# EAGLE board Mixer v18 (EAGLE 9.7.0)
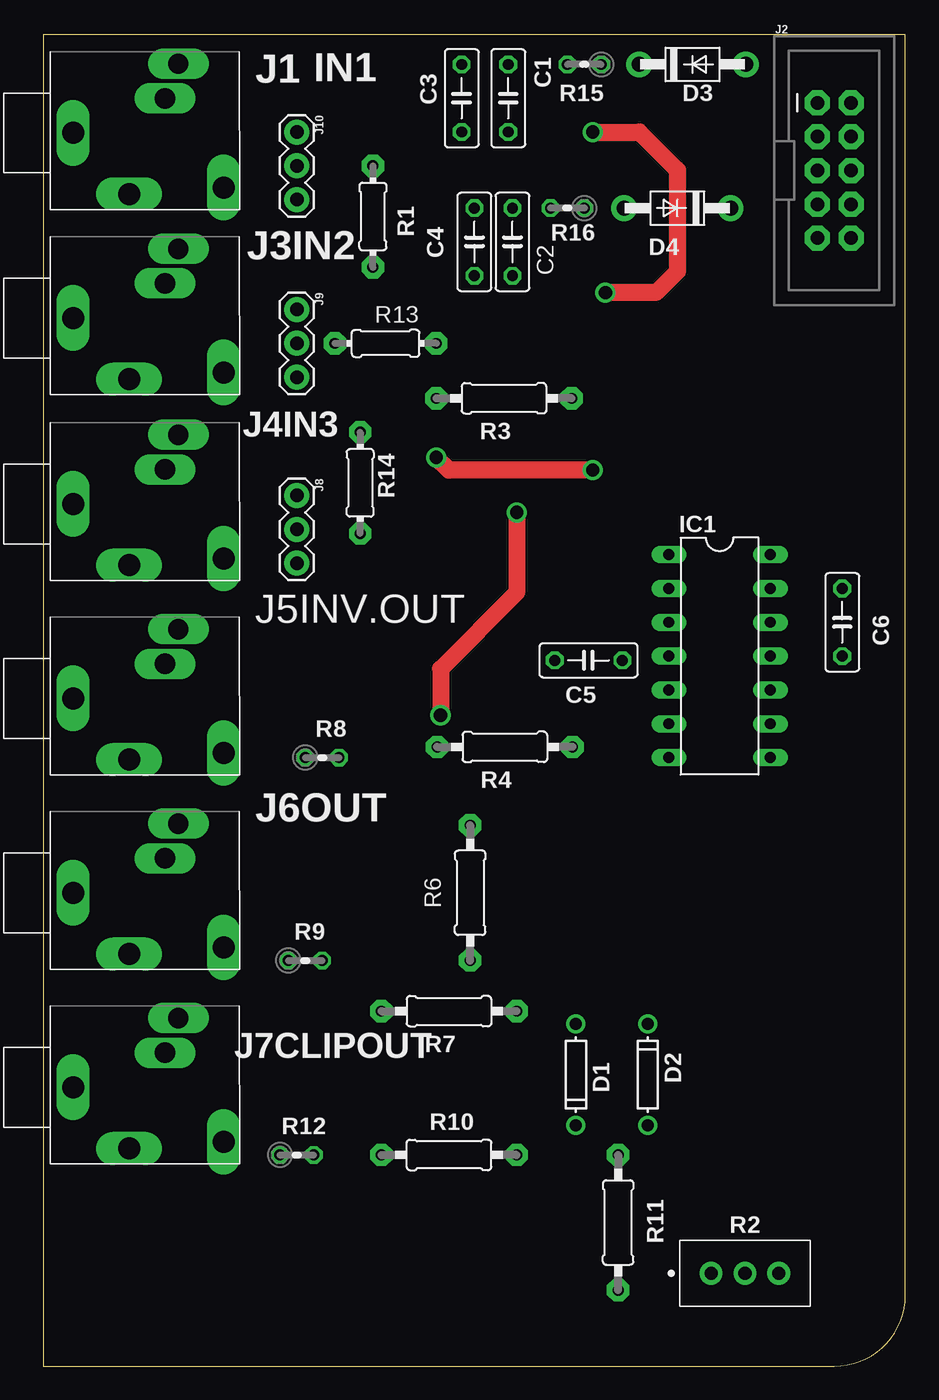
[diagram p0: board, top side]
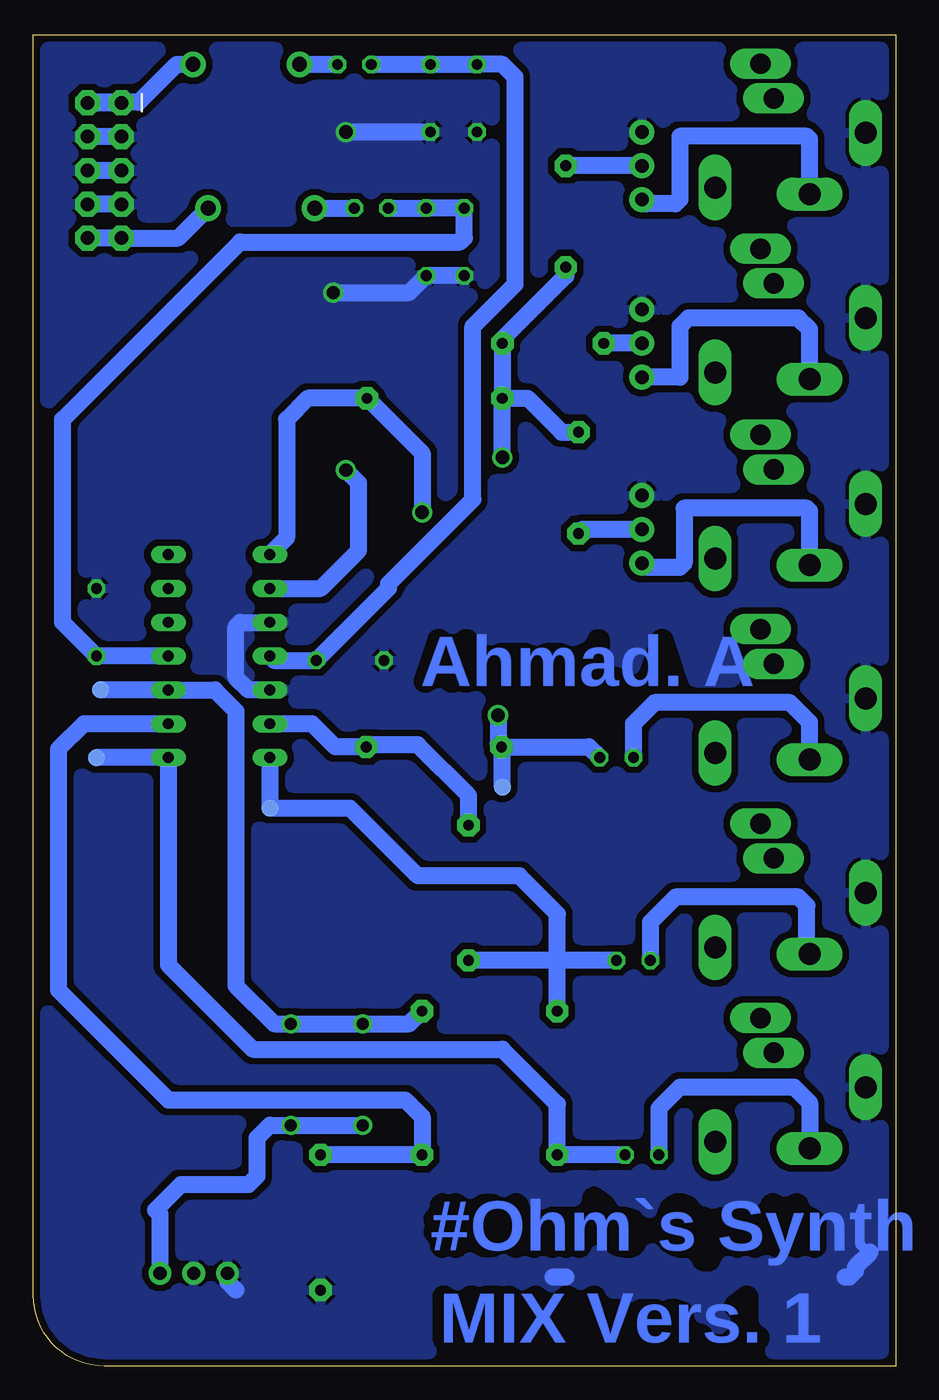
[diagram p1: board, bottom side, seen from below]

Size 64.75 x 100 mm. Coordinates in mm from the lower left corner, seen from the top.
Outline: 0,0 59.41,0 arc90 64.75,5.34 64.75,100 0,100 0,0
Copper layers (1*16): Top / Bottom
Stack-up Default Layer Stack: Top User Defined 0.035mm / Dielectric-1 User Defined 1.5mm / Bottom User Defined 0.035mm
Design rules "default *": minimum track width 6mil, minimum drill 0.35mm, track to track 6mil, track to pad 6mil, pad to pad 6mil, via to via 6mil, smd to smd 6mil, copper to edge 6mil, drill to drill 6mil, minimum pad ring 10mil, minimum via ring 8mil, stop-mask expansion 4mil, vias tented up to drill 0mil, thermal gap 10mil

## Footprints (pad centres in the part's own frame; a part is rotated, then mirrored left to right if it is on the bottom)
C050-025X075 = drill 0.813 octagon: 1 -2.54,0; 2 2.54,0
DO-1N4148 = drill 0.9: A -3.81,0; C 3.81,0
DO41-7 = drill 1.118 pad 1.93: A 4,0; C -4,0
DIL14 = drill 0.813 long: 1 -7.62,-3.81; 2 -5.08,-3.81; 3 -2.54,-3.81; 4 0,-3.81; 5 2.54,-3.81; 6 5.08,-3.81; 7 7.62,-3.81; 8 7.62,3.81; 9 5.08,3.81; 10 2.54,3.81; 11 0,3.81; 12 -2.54,3.81; 13 -5.08,3.81; 14 -7.62,3.81
PJ-324M = drill 1.651 pad 1.905 long: 1 -5.4,0; 4 5.9,-4.1; 5 -1.2,-4.6 | drill 1.524 pad 1.778 long: 2 2.5,5.2 | drill 1.524 pad 1.905 long: 3 1.5,2.6
2X5-SHROUDED-NS = drill 1.016 pad 1.88 octagon: 1 -1.27,5.08; 2 1.27,5.08; 3 -1.27,2.54; 4 1.27,2.54; 5 -1.27,0; 6 1.27,0; 7 -1.27,-2.54; 8 1.27,-2.54; 9 -1.27,-5.08; 10 1.27,-5.08
1X03 = drill 1.016 pad 1.88: 1 0,0; 2 2.54,0; 3 5.08,0
0204/7 = drill 0.813 pad 1.676 octagon: 1 -3.81,0; 2 3.81,0
PV36W = drill 1 pad 1.7: 1 0,0; 2 2.54,0; 3 5.08,0
0207/10 = drill 0.813 pad 1.676 octagon: 1 -5.08,0; 2 5.08,0
0204V = drill 0.813 octagon: 1 -1.27,0; 2 1.27,0
PAD.03X.05 = smd 1.27 x 1.27: P$1 0,0

## Placement (x,y rotation side)
C1  47 uF  [C050-025X075]  34.93,95.25 270 top
C2  47 uF  [C050-025X075]  35.24,84.46 90 top
C3  0.1 uF  [C050-025X075]  31.43,95.25 270 top
C4  0.1 uF  [C050-025X075]  32.38,84.46 90 top
C5  0.1 uF  [C050-025X075]  40.96,53.02 180 top
C6  0.1 uF  [C050-025X075]  60.01,55.88 270 top
D1  [DO-1N4148]  40.01,21.91 270 top
D2  [DO-1N4148]  45.4,21.91 90 top
D3  [DO41-7]  48.76,97.79 0 top
D4  [DO41-7]  47.62,87 180 top
IC1  TL074P  [DIL14]  50.8,53.34 270 top
J1  AUDIO_JACK_PJ-324M  [PJ-324M]  7.65,92.64 0 top
J2  [2X5-SHROUDED-NS]  59.4,89.82 0 top
J3IN2  AUDIO_JACK_PJ-324M  [PJ-324M]  7.65,78.74 0 top
J4IN3  AUDIO_JACK_PJ-324M  [PJ-324M]  7.65,64.77 0 top
J5INV.OUT  AUDIO_JACK_PJ-324M  [PJ-324M]  7.65,50.16 0 top
J6OUT  AUDIO_JACK_PJ-324M  [PJ-324M]  7.65,35.56 0 top
J7CLIPOUT  AUDIO_JACK_PJ-324M  [PJ-324M]  7.65,20.95 0 top
J8  [1X03]  19.05,65.41 270 top
J9  [1X03]  19.05,79.38 270 top
J10  [1X03]  19.05,92.71 270 top
R1  100K  [0204/7]  24.77,86.36 270 top
R2  20K  [PV36W]  50.16,6.98 0 top
R3  100K  [0207/10]  34.61,72.71 180 top
R4  100K  [0207/10]  34.67,46.52 180 top
R6  100K  [0207/10]  32.07,35.56 90 top
R7  100K  [0207/10]  30.48,26.67 180 top
R8  1K  [0204V]  20.95,45.72 0 top
R9  1K  [0204V]  19.69,30.48 0 top
R10  100K  [0207/10]  30.48,15.88 0 top
R11  27K  [0207/10]  43.18,10.79 270 top
R12  1K  [0204V]  19.05,15.88 0 top
R13  100K  [0204/7]  25.72,76.84 0 top
R14  100K  [0204/7]  23.81,66.36 90 top
R15  10  [0204V]  40.64,97.79 180 top
R16  10  [0204V]  39.37,87 180 top
TP1B  TEST-POINT3X5  [PAD.03X.05]  46.99,41.91 0 bottom
TP3A  TEST-POINT3X5  [PAD.03X.05]  29.53,43.5 270 bottom
TP4C  TEST-POINT3X5  [PAD.03X.05]  59.69,50.8 0 bottom
TP5D  TEST-POINT3X5  [PAD.03X.05]  60.01,45.72 0 bottom

## Library data of the parts
C1-C6 D1-D4 R1 R3 R4 R6-R16 = adafruit
IC1 = linear
J1 J3IN2 J4IN3 J5INV.OUT J6OUT J7CLIPOUT = Synthesizer v25
J2 = SparkFun-Connectors; PROD_ID: CONN-08671; SF_ID: PRT-08506
J8-J10 TP1B TP3A TP4C TP5D = SparkFun-Connectors
R2 = Resistor; CATEGORY: Resistor; DESCRIPTION: Lead Sealed Type Multiturn PV36 Series; MANUFACTURER: BOURNS; MPN: PV36W; OPERATING_TEMPERATURE: -55 to +125 °C; PART_STATUS: Active; ROHS_COMPLIANCE: RoHS Compliant; SERIES: PV36; SUB-CATEGORY: Trimpot; TYPE: Lead Sealed

## Nets
+12: C1.1 C3.1 C5.1 IC1.4 R15.2
+12_IN: D3.A J2.1 J2.2
-12: C2.2 C4.2 C6.2 IC1.11 R16.2
-12_IN: D4.C J2.9 J2.10
GND: C1.2 C2.1 C3.2 C4.1 C5.2 C6.1 IC1.3 IC1.5 J1.1 J2.3 J2.4 J2.5 J2.6 J2.7 J2.8 J3IN2.1 J4IN3.1 J5INV.OUT.1 J6OUT.1 J7CLIPOUT.1 J8.1 J9.1 J10.1 R2.1 R2.2 R11.2
N$1: IC1.1 R3.1 R4.2 R8.2 TP3A.P$1
N$2: IC1.6 R4.1 R6.2
N$4: IC1.7 R6.1 R7.2 R9.2 TP1B.P$1
N$5: J1.5 J10.3
N$6: D1.C D2.A R2.3
N$7: D1.A D2.C IC1.10 R7.1 TP4C.P$1
N$8: IC1.9 R10.2 R11.1
N$9: IC1.8 R10.1 R12.2 TP5D.P$1
N$10: J9.2 R13.1
N$11: J8.2 R14.1
N$12: IC1.2 R1.2 R3.2 R13.2 R14.2
N$13: J4IN3.5 J8.3
N$14: J5INV.OUT.5 R8.1
N$15: J3IN2.5 J9.3
N$16: D3.C R15.1
N$17: D4.A R16.1
N$18: J6OUT.5 R9.1
N$19: J7CLIPOUT.5 R12.1
TEST: J10.2 R1.1

## Tracks (layer width: path | path; a pad name or v marks a point on that pad's centre or on a via)
+12
  Bottom 1.27: R15.2 C1.1 C3.1 29.53,97.79 28.58,96.84 28.58,81.28 31.75,78.1 31.75,65.12 38.08,58.79 38.08,58.45 C5.1 46.67,53.02 IC1.4
+12_IN
  Bottom 1.27: J2.1 J2.2 60.64,94.93 56.83,94.93 53.98,97.79 D3.A
-12
  Bottom 1.27: R16.2 C2.2 C4.2 32.38,84.77 32.7,84.46 49.21,84.46 62.55,71.12 62.55,55.88 C6.2 IC1.11
-12_IN
  Bottom 1.27: J2.10 J2.9 53.88,84.74 D4.C
GND  (via drill 1)
  Top 1.27: v41.27,92.71 44.77,92.71 47.62,89.85 47.62,82.23 46.04,80.65 v42.23,80.65
  Bottom 1.27: J7CLIPOUT.1 1.9,20.61 | 49.53,5.71 50.16,6.35 R2.1 | C4.1 C2.1 36.51,80.65 v42.23,80.65 | C1.2 v41.27,92.71 | J2.7 J2.8 | J2.5 J2.6 | J2.3 J2.4 | IC1.5 48.58,50.8 49.53,51.75 49.53,55.56 49.21,55.88 IC1.3 | 1.9,8.57 3.01,7.46 3.01,7.14 3.47,6.68 3.79,6.68 | 24.75,6.68 25.72,6.68
  pour Bottom (isolate 0.508): 77.47,107.63 -7.62,107.63 77.47,107.63 77.47,-5.08 -9.53,-5.08 -9.53,105.41
N$1  (via drill 1, 1.02)
  Top 1.27: v35.56,64.13 35.56,58.1 29.84,52.39 v29.84,48.89
  Bottom 1.27: R4.2 23.02,46.52 R8.2 | IC1.1 45.72,62.23 45.72,71.12 44.13,72.71 R3.1 35.56,68.58 v35.56,64.13 | TP3A.P$1 29.53,46.46 R4.2 | R4.2 29.84,46.77 v29.84,48.89
N$2
  Bottom 1.27: IC1.6 43.82,48.26 42.08,46.52 R4.1 39.6,46.67 35.88,46.67 32.07,42.86 R6.2
N$4
  Bottom 1.27: IC1.7 TP1B.P$1 40.96,41.91 35.88,36.83 28.26,36.83 25.4,33.97 25.4,30.8 | R7.2 25.4,30.8 | R9.2 25.08,30.48 | 25.08,30.48 25.4,30.8 | 25.08,30.48 R6.1
N$5
  Bottom 1.27: J1.5 6.45,92.18 6.67,92.39 16.19,92.39 16.19,87.63 16.51,87.31 18.73,87.31 J10.3
N$6
  Bottom 1.27: R2.3 55.24,11.43 55.56,11.75 53.66,13.65 48.58,13.65 47.94,14.29 47.94,17.14 46.99,18.1 D2.A D1.C
N$7
  Bottom 1.27: R7.1 36.51,25.72 D1.A D2.C 46.67,25.72 49.53,28.58 49.53,49.21 51.12,50.8 IC1.10 TP4C.P$1
N$8
  Bottom 1.27: R11.1 R10.2 35.56,18.73 36.83,20 54.61,20 62.87,28.26 62.87,46.35 60.96,48.26 IC1.9
N$9
  Bottom 1.27: TP5D.P$1 IC1.8 54.61,30.16 48.26,23.81 29.53,23.81 25.4,19.68 R10.1 R12.2
N$10
  Bottom 1.27: J9.2 R13.1
N$11
  Bottom 1.27: J8.2 23.5,62.87 R14.1
N$12  (via drill 1)
  Top 1.27: v41.27,67.31 30.48,67.31 v29.53,68.26
  Bottom 1.27: R3.2 27.62,72.71 25.08,70.17 R14.2 | R3.2 R13.2 29.53,77.15 24.77,81.91 R1.2 | IC1.2 43.18,58.42 40.32,61.28 40.32,66.36 v41.27,67.31 | v29.53,68.26 R3.2
N$13
  Bottom 1.27: J4IN3.5 6.45,64.24 6.67,64.45 15.87,64.45 15.87,60.32 16.19,60.01 18.73,60.01 J8.3
N$14
  Bottom 1.27: J5INV.OUT.5 6.45,48.36 7.94,49.85 18.1,49.85 19.69,48.26 R8.1
N$15
  Bottom 1.27: J3IN2.5 6.45,77.89 7.3,78.74 15.56,78.74 16.19,78.1 16.19,74.29 J9.3
N$16
  Bottom 1.27: D3.C R15.1
N$17
  Bottom 1.27: D4.A R16.1
N$18
  Bottom 1.27: J6OUT.5 6.67,31.17 6.67,34.61 7.3,35.24 16.51,35.24 18.41,33.34 R9.1
N$19
  Bottom 1.27: J7CLIPOUT.5 6.45,19.79 7.62,20.95 16.19,20.95 17.78,19.37 R12.1
TEST
  Bottom 1.27: J10.2 R1.1

## Text on the board
Bottom: Ahmad. A | #Ohm`s Synth | MIX Vers. 1
tNames: IN1